# EAGLE board VLNA (EAGLE 6.2)
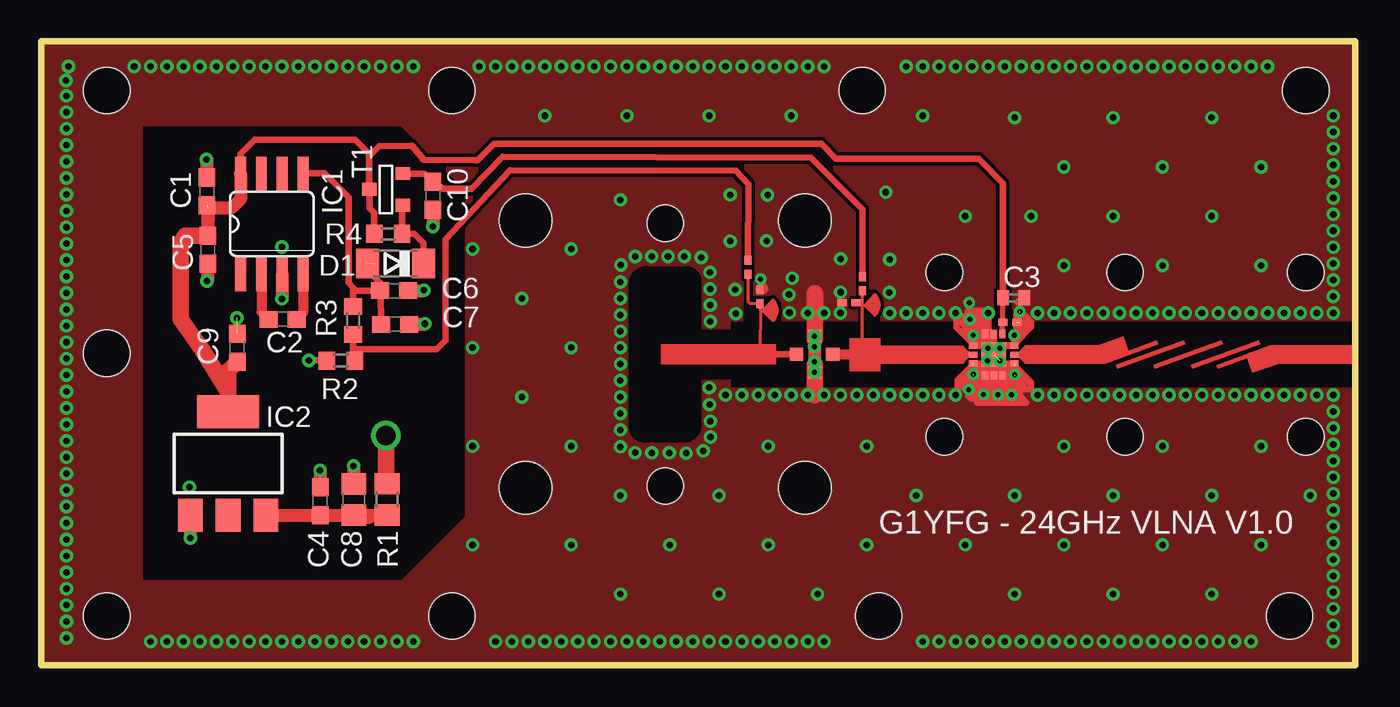
[diagram p0: board, top side]
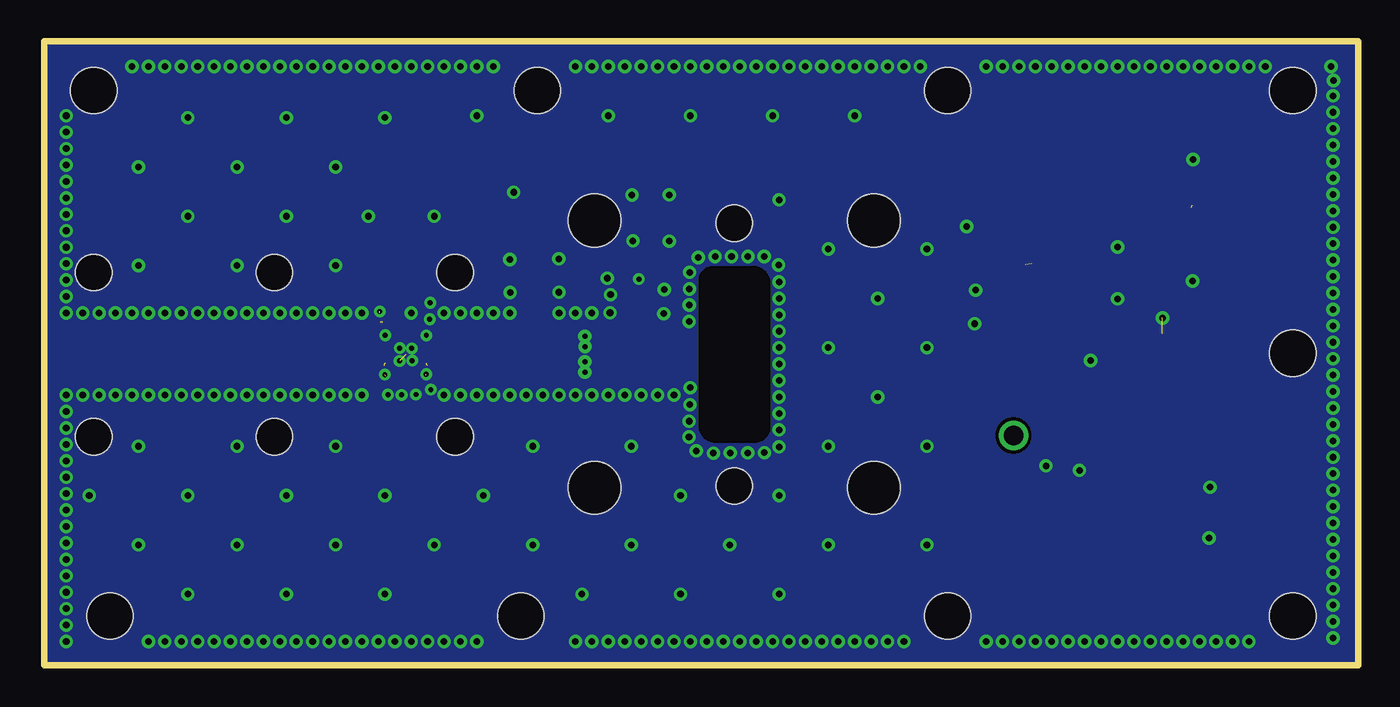
[diagram p1: board, bottom side, seen from below]

Size 80 x 38 mm. Coordinates in mm from the lower left corner, seen from the top.
Outline: 0,0 80,0 80,38 0,38 0,0
Copper layers (1*16): Top 0.035mm / dielectric 1.5mm / Bottom 0.035mm
Design rules: minimum track width 10mil, minimum drill 24mil, track to track 8mil, track to pad 8mil, pad to pad 8mil, via to via 8mil, smd to smd 8mil, copper to edge 0mil, drill to drill 8mil, minimum pad ring 10mil, minimum via ring 8mil, stop-mask expansion 4mil, vias tented up to drill 0mil, thermal gap 10mil
Net classes: 2 SPACED: clearance 0.8 mm
Holes 2.2 mm at 38,26.92 38,10.92 55,23.92 55,13.92 66,13.92 66,23.92 77,23.92 77,13.92
Holes 2.8 mm at 76,3 51,3 4,3 4,19 4,35 25,35 50,35 77,35 25,3
tRestrict: area 42,16.9 to 80,20.9; area 39.7,17.4 to 42.7,20.4; area 42.8,20.7 to 43.5,22

## Footprints (pad centres in the part's own frame; a part is rotated, then mirrored left to right if it is on the bottom)
C0603 = smd 1.1 x 1: 1 -0.85,0; 2 0.85,0
C0402 = smd 0.7 x 0.9: 1 -0.65,0; 2 0.65,0
C0805 = smd 1.3 x 1.5: 1 -0.95,0; 2 0.95,0
SOD80C = smd 1.4 x 1.8: A 1.7,0; C -1.7,0
SO08 = smd 0.66 x 2.032: 1 -1.905,-3.073; 2 -0.635,-3.073; 3 0.635,-3.073; 4 1.905,-3.073; 5 1.905,3.073; 6 0.635,3.073; 7 -0.635,3.073; 8 -1.905,3.073
SOT223 = smd 1.5 x 2: 1 -2.3,-3.15; 2 0,-3.15; 3 2.3,-3.15 | smd 3.8 x 2: 4 0,3.15
R0805 = smd 1.3 x 1.5: 1 -0.95,0; 2 0.95,0
R0603 = smd 1 x 1.1: 1 -0.85,0; 2 0.85,0
SOT-23 = smd 0.787 x 0.889: 1 0.025,-1.016; 2 -0.94,1.016; 3 0.991,1.016
FLANGE = hole 3.2: -8.509,8.128; 8.509,8.128; -8.509,-8.128; 8.509,-8.128
MICROX = smd 0.8 x 0.8: P$1 -1.1,0; P$2 0,1.1; P$3 1.1,0; P$4 0,-1.1 | drill 0.3 pad 0.406: P$5 -0.009,0.466; P$6 0,-0.457; P$7 0,1.1; P$8 0,-1.1
HMC = smd 1.5 x 1.5: P$1 0,0 | smd 0.5 x 0.36: P$6 -1.25,0.53; P$7 -1.25,0; P$8 -1.25,-0.53; P$12 1.25,-0.53; P$13 1.25,0; P$14 1.25,0.53 | smd 0.36 x 0.5: P$9 -0.53,-1.25; P$10 0,-1.25; P$11 0.53,-1.25; P$15 0.53,1.25; P$16 0,1.25; P$17 -0.53,1.25
0402S = smd 0.55 x 0.425: P$1 -0.425,0; P$2 0.425,0

## Placement (x,y rotation side)
C1  [C0603]  10.11,28.85 90 top
C2  [C0603]  14.72,21.06 0 top
C3  [C0402]  59.21,22.38 0 top
C4  [C0603]  17,10 90 top
C5  [C0603]  10.15,25.3 270 top
C6  [C0603]  21.49,22.81 0 top
C7  [C0603]  21.55,20.76 0 top
C8  [C0805]  19.04,10.1 90 top
C9  [C0603]  11.94,19.34 90 top
C10  [C0603]  23.86,28.58 270 top
D1  [SOD80C]  21.58,24.47 180 top
IC1  ICL7660CSA  [SO08]  14.05,26.87 0 top
IC2  LM317MBSTT3  [SOT223]  11.39,12.3 0 top
R1  10R  [R0805]  21.06,10.11 270 top
R2  [R0603]  18.25,18.56 0 top
R3  [R0603]  19,21 90 top
R4  [R0603]  21.13,26.27 180 top
T1  [SOT-23]  21,29 270 top
U$1  [FLANGE]  38,18.95 0 top
U$2  24GHZ_OP  [FILTER]  64.33,18.92 0 top
U$3  CE3520K3  [MICROX]  47.1,18.94 0 top
U$4  HMC341  [HMC]  58,18.92 270 top
U$5  RES_0402SHORT  [0402S]  43.05,24.22 90 top
U$6  CAP_0402SHORT  [0402S]  43.76,22.45 90 top
U$7  CAP_0402SHORT  [0402S]  49.19,22.08 180 top
U$8  CAP_0402SHORT  [0402S]  58.99,20.9 180 top
U$9  RES_0402SHORT  [0402S]  50.01,23.22 90 top
U$10  STUB  [QTR_STUB]  43.89,21.6 0 top
U$11  STUB  [QTR_STUB]  50.1,21.92 0 top

## Library data of the parts
C1-C10 R1-R4 = rcl
D1 = diode
IC1 = maxim; MF: MAXIM; MPN: ICL7660CSA; OC_FARNELL: 9724710; OC_NEWARK: 34C3732
IC2 = v-reg
T1 = zetex; OC_FARNELL: unknown; OC_NEWARK: unknown
U$1-U$11 = 24GHz

## Nets
12V_IN: R1.1
+3.3V: C1.1 C3.1 C5.1 C9.1 IC1.8 IC2.4 R4.2 T1.1 U$4.P$6 U$8.P$2
-3.3V: C6.1 C7.1 D1.A IC1.5 R3.2
GND: C1.2 C3.2 C4.2 C5.2 C6.2 C7.2 C8.2 C9.2 C10.2 IC1.3 IC2.1 R2.1 U$3.P$2 U$3.P$4 U$3.P$5 U$3.P$6 U$3.P$7 U$3.P$8 U$4.P$1 U$4.P$9 U$4.P$11 U$4.P$15 U$4.P$17 U$6.P$2 U$7.P$2 U$8.P$1
N$1: C2.1 IC1.2
N$2: C2.2 IC1.4
N$3: C4.1 C8.1 IC2.3 R1.2
N$4: R2.2 R3.1 U$5.P$2
N$5: U$3.P$1 U$5.P$1 U$6.P$1
N$6: U$3.P$3 U$7.P$1 U$9.P$1
N$9: C10.1 T1.2 U$9.P$2
N$10: D1.C R4.1 T1.3

## Tracks (layer width: path | path; a pad name or v marks a point on that pad's centre or on a via)
+3.3V  (1 unrouted)
  Top 0.3: U$4.P$6 58.53,21.12 U$8.P$2 58.57,22.37 C3.1 | 10.16,27.86 C5.1 | 12.14,29.94 IC1.8
  Top 0.406: IC1.8 12.14,31.14 13,32 19.11,32 19.96,31.16 20,31.16 19.98,31.14 19.98,31 | 11,15 11,15.06 IC2.4 | R4.2 20.28,27.54 19.99,27.83 19.99,28.96 T1.1 19.98,31 | C3.1 58.56,29.36 57.09,30.83 48.4,30.85 47.5,31.75 27.57,31.75 26.58,30.76 26.46,30.76 23.29,30.76 22.58,31.62 20.58,31.6 19.98,31
  Top 0.8: 10.15,27.84 C5.1 10.18,27.87 | IC1.8 12.14,28.38 11.63,27.86 10.16,27.86
  Top 1.016: IC2.4 11.39,16.65 | 11.39,16.65 11.39,17.94 C9.1 | C5.1 8.77,26.15 8.5,25.72 8.5,21.06 9.82,19.21 9.82,19.22 11.39,16.65
-3.3V  (1 unrouted)
  Top 0.406: 19,23 R3.2 | 19,23 19.19,22.81 C6.1 20.66,22.84 | C7.1 20.66,22.84 | IC1.5 17.27,29.94 18.72,28.49 18.72,23.28 19,23 | 20.66,22.84 20.66,23.27 20.29,23.64 20.29,24.41
GND  (via drill 0.3 pad 0.3, 0.4, 0.4 pad 0.55)  (10 unrouted)
  Top 0.406: 56.77,18.36 56.77,18.05 56.76,17.67 56.76,16.6 56.41,16.63 | 59.27,18.35 59.25,17.88 59.26,17.63 59.26,16.59 59.58,16.56 | 56.61,22.18 | 59.47,22.12 59.46,22.12 | U$4.P$9 v56.75,20.08 | U$4.P$17 v59.25,20.09 | v16.31,18.56 R2.1 | 57,16 60,16 59.73,16.27 56.6,16.27 56.46,16.4 56.46,16.73 | 56.68,18.25 55.8,17.37 55.8,16.96 55.82,16.94 56.38,16.94 56.4,16.95 56.4,17.53 56.09,17.23 56.06,17.23 | 59.14,18.23 59.14,18.24 59.29,18.24 60.27,17.26 60.27,16.8 60.26,16.81 59.54,16.81 59.53,16.82 59.53,17.44 59.59,17.39 59.79,17.39 59.88,17.3 59.88,17.16 | 56.68,19.64 55.73,20.59 55.73,20.6 55.74,20.61 55.74,21.24 55.75,21.23 56.37,21.23 56.08,20.95 56.08,20.79 56.27,20.6 56.27,20.46 56.38,20.35 56.38,20.31 56.39,20.32 56.39,21.36 56.41,21.39 56.41,21.55 56.46,21.6 57.01,21.6 57.02,21.59 57.29,21.59 57.33,21.55 57.65,21.55 57.52,21.42 57.52,20.64 57.2,20.64 | 59.35,19.72 59.27,19.65 59.27,19.58 60.27,20.58 60.27,20.92 59.91,21.28 59.87,21.28 59.67,21.48 59.59,21.48 59.55,21.43 59.55,20.9 59.57,20.88 59.8,20.88 59.81,20.86 59.84,20.86 59.82,20.84 59.82,20.6 59.81,20.59 59.81,20.57 60,20.76 60,20.78 59.57,20.35 59.47,20.35
  Top 0.5: U$6.P$2 44.03,22.88 v43.81,23.52
  Top 0.8: C5.2 10.15,23.46 v10.1,23.4 | C1.2 10.11,30.76 v10.06,30.8 | IC1.3 14.69,22.34 v14.66,22.31 | C6.2 23.27,22.81 v23.3,22.84 | C7.2 23.33,20.75 v23.37,20.8 | IC2.1 v9.09,7.76 v9.1,7.75 | v16.99,11.88 16.99,10.86 C4.2 | v19.02,12.15 19.02,11.07 C8.2 | C10.2 v23.86,26.72
  Top 1.016: 47.1,18.32 47.1,16.47 47.08,16.45 | 47.12,22.65 47.12,19.86 47.11,19.85
  other vias: 40.68,16.91 41.67,16.45 42.67,16.45 43.67,16.45 44.67,16.45 45.67,16.45 46.67,16.45 47.67,16.45 48.67,16.45 49.67,16.45 50.67,16.45 51.67,16.45 40.75,20.94 40.73,22.91 40.72,23.93 40.19,24.83 35.27,23.34 35.27,22.34 35.27,21.34 35.27,20.34 35.27,19.34 35.27,18.34 35.27,17.34 35.27,16.34 35.27,15.34 35.27,14.34 35.27,13.3 36.17,12.95 37.19,12.94 38.24,12.94 39.27,12.92 40.76,13.91 40.7,15.87 40.75,14.86 35.3,24.36 36.17,24.89 37.17,24.89 38.17,24.89 39.17,24.89 52.67,16.45 53.67,16.45 54.67,16.45 55.67,16.45 59.27,17.7 56.76,17.72 56.48,16.79 57.38,16.49 58.25,16.47 59.09,16.48 56.54,21.07 59.59,21.54 56.51,22.08 60.67,16.45 61.67,16.45 62.67,16.45 63.67,16.45 64.67,16.45 65.67,16.45 66.67,16.45 45.72,23.56 45.53,22.57 45.57,21.47 46.67,21.45 47.67,21.45 48.67,21.45 51.67,21.45 52.67,21.45 53.67,21.45 54.67,21.45 60.67,21.45 61.67,21.45 62.67,21.45 63.67,21.45 64.67,21.45 65.67,21.45 66.67,21.45 67.67,21.45 68.67,21.45 69.67,21.45 70.67,21.45 71.67,21.45 72.67,21.45 73.67,21.45 74.67,21.45 75.67,21.45 76.67,21.45 77.67,21.45 78.67,21.45 74.67,16.45 75.67,16.45 76.67,16.45 77.67,16.45 78.67,16.45 67.67,16.45 68.67,16.45 69.67,16.45 70.67,16.45 71.67,16.45 72.67,16.45 73.67,16.45 78.67,16.45 57.64,19.3 58.37,19.32 57.61,18.55 58.38,18.54 9.67,36.45 10.67,36.45 11.67,36.45 12.67,36.45 13.67,36.45 14.67,36.45 15.67,36.45 26.67,36.45 27.67,36.45 28.67,36.45 29.67,36.45 16.67,36.45 17.67,36.45 18.67,36.45 19.67,36.45 20.67,36.45 21.67,36.45 22.67,36.45 30.67,36.45 31.67,36.45 32.67,36.45 33.67,36.45 34.67,36.45 35.67,36.45 36.67,36.45 37.67,36.45 38.67,36.45 39.67,36.45 40.67,36.45 41.67,36.45 42.67,36.45 36.67,36.45 37.67,36.45 38.67,36.45 39.67,36.45 40.67,36.45 41.67,36.45 42.67,36.45 43.67,36.45 1.55,1.67 1.55,2.67 1.55,3.67 1.55,4.67 1.55,5.67 1.55,6.67 1.55,7.67 1.55,15.67 1.55,16.67 1.55,17.67 1.55,18.67 1.55,19.67 1.55,20.67 1.55,21.67 1.55,8.67 1.55,9.67 1.55,10.67 1.55,11.67 1.55,12.67 1.55,13.67 1.55,14.67 1.55,22.67 1.55,23.67 1.55,24.67 1.55,25.67 1.55,26.67 1.55,27.67 1.55,28.67 1.55,29.67 1.55,30.67 1.55,31.67 1.55,32.67 1.55,33.67 1.55,34.67 1.55,28.67 1.55,29.67 1.55,30.67 1.55,31.67 1.55,32.67 1.55,33.67 1.55,34.67 44.67,36.45 45.67,36.45 46.67,36.45 47.67,36.45 58.67,36.45 59.67,36.45 60.67,36.45 61.67,36.45 62.67,36.45 63.67,36.45 64.67,36.45 52.67,36.45 53.67,36.45 54.67,36.45 55.67,36.45 56.67,36.45 57.67,36.45 65.67,36.45 66.67,36.45 67.67,36.45 68.67,36.45 69.67,36.45 70.67,36.45 71.67,36.45 73.67,36.45 74.67,36.45 72.67,36.45 9.67,1.45 10.67,1.45 11.67,1.45 12.67,1.45 13.67,1.45 14.67,1.45 15.67,1.45 27.67,1.45 28.67,1.45 29.67,1.45 16.67,1.45 17.67,1.45 18.67,1.45 19.67,1.45 20.67,1.45 21.67,1.45 22.67,1.45 30.67,1.45 31.67,1.45 32.67,1.45 33.67,1.45 34.67,1.45 35.67,1.45 36.67,1.45 37.67,1.45 38.67,1.45 39.67,1.45 40.67,1.45 41.67,1.45 42.67,1.45 36.67,1.45 37.67,1.45 38.67,1.45 39.67,1.45 40.67,1.45 41.67,1.45 42.67,1.45 43.67,1.45 44.67,1.45 45.67,1.45 46.67,1.45 47.67,1.45 58.67,1.45 59.67,1.45 60.67,1.45 61.67,1.45 62.67,1.45 63.67,1.45 64.67,1.45 53.67,1.45 54.67,1.45 55.67,1.45 56.67,1.45 57.67,1.45 65.67,1.45 66.67,1.45 67.67,1.45 68.67,1.45 69.67,1.45 70.67,1.45 71.67,1.45 72.67,1.45 73.67,1.45 6.67,1.45 7.67,1.45 8.67,1.45 9.67,1.45 48.67,22.71 1.67,36.45 5.67,36.45 6.67,36.45 7.67,36.45 8.67,36.45 1.52,35.6 14.66,25.47 11.92,21.15 9.04,10.85 40.73,21.94 40.31,13.06 78.67,33.45 78.67,32.45 78.67,31.45 78.67,30.45 78.67,29.45 78.67,28.45 78.67,27.45 78.67,26.45 78.67,25.45 78.67,24.45 78.67,23.45 78.67,22.45 78.67,15.45 78.67,14.45 78.67,13.45 78.67,12.45 78.67,11.45 78.67,10.45 78.67,9.45 78.67,8.45 78.67,6.45 78.67,7.45 78.67,5.45 78.67,4.45 78.67,3.45 78.67,2.45 78.67,1.45 40.67,33.45 35.67,33.45 30.67,33.45 45.67,33.45 53.67,33.45 44.17,25.84 41.95,25.82 41.96,28.64 44.23,28.62 48.68,24.75 51.43,28.8 51.67,24.71 29.27,22.34 29.27,16.34 32.27,19.34 32.27,25.34 32.27,13.34 26.27,13.34 26.27,19.34 26.27,25.34 26.27,7.34 32.27,7.34 38.27,7.34 44.27,7.34 35.27,10.34 41.27,10.34 44.27,13.34 50.27,13.34 50.27,7.34 53.27,10.34 56.27,7.34 62.27,7.34 59.27,10.34 68.27,7.34 65.27,10.34 62.27,13.34 68.27,13.34 71.27,10.34 74.27,13.34 74.27,7.34 74.27,24.34 68.27,24.34 71.27,27.34 68.27,30.34 74.27,30.34 65.27,27.34 62.27,30.34 35.27,28.34 62.27,24.34 55.67,21.45 57.67,21.45 60.27,27.34 56.27,27.34 65.27,33.34 71.27,33.34 59.27,33.34 35.27,4.34 41.27,4.34 47.27,4.34 59.27,4.34 65.27,4.34 71.27,4.34 77.27,10.34 42.29,21.41 42.26,22.89 51.64,22.7
  pour Top (no thermals): 22,38 80,38 80,0 22,0 22,5 26,9 26,28.98 22,32.98
  pour Bottom (no thermals): 0,38 80,38 80,0 0,0
  pour Top: 25,5 6,5 6,33 22,33 22,38 0,38 0,0 25,0
N$1
  Top 0.6: IC1.2 13.41,21.52 C2.1
N$2
  Top 0.6: IC1.4 15.96,21.45 C2.2
N$3
  Top 0.8: IC2.3 C4.1 19.85,9.15 20,9 19.19,9 C8.1 R1.2
N$4
  Top 0.406: 19.15,20 R3.1 19,19.76 19,19.23 | U$5.P$2 43.06,29.28 42.31,30.1 28.54,30.13 24.62,25.94 24.63,19.79 24.08,19.24 19,19.23 | 19,19.23 R2.2
N$5
  Top 0.18: 43,18.94 43,18.92 42.45,18.92 43.78,19.22 43.78,21.63 43.78,22 U$6.P$1 43.15,22.02 43.06,22.11 43.06,23.79 U$5.P$1
  Top 0.406: U$3.P$1 43.02,18.94 43,18.92
N$6
  Top 0.178: 50,18.94 50,21.92
  Top 0.18: 50,21.92 50,22.09 | 50,22.09 50,22.75 U$9.P$1 | U$7.P$1 50,22.08 50,22.09
  Top 0.254: 50.09,22.72 U$9.P$1
  Top 0.6: U$3.P$3 50,18.94
N$8
  Top 0.2: 56.1,19.36 56.54,18.89 56.15,19.11
N$9
  Top 0.406: U$9.P$2 50.01,27.77 46.87,30.91 28.1,30.96 26.21,29.02 24.45,29.02 C10.1 23.35,29.94 T1.2
N$10
  Top 0.406: 21.99,26.26 R4.1 | R4.1 21.98,27.98 T1.3 | R4.1 22.7,26.27 23.28,25.69 D1.C
N$11
  Top 0.2: 56.46,18.88 56.11,18.46 56.18,18.74
N$12
  Top 0.2: 59.53,18.98 59.92,19.38 59.83,19.05 59.83,18.82 59.94,18.47 59.52,18.84
N$13
  Top 0.406: 58.01,19.45 58,19.45
N$14  (via drill 1.2)
  Top 1.016: 21,11 v21,14
(copper drawn outside any net)
  shapes: Top area x16

## Text on the board
tNames: G1YFG - 24GHz VLNA V1.0